# Altium PCB DSpico_PCB.PcbDoc (part 2 of 2)
Units mm, origin at the board's own origin, x right, y up, seen from the top; angles counter-clockwise.
Board outline 27.22 x 30.1 mm, 4 copper layers (L1, L2-GND, L3-PW, L4), stack 0.77 mm thick; 52 components, 45 nets, 173 pads, 142 vias.
Unrouted connection lines stored in the file: 1.
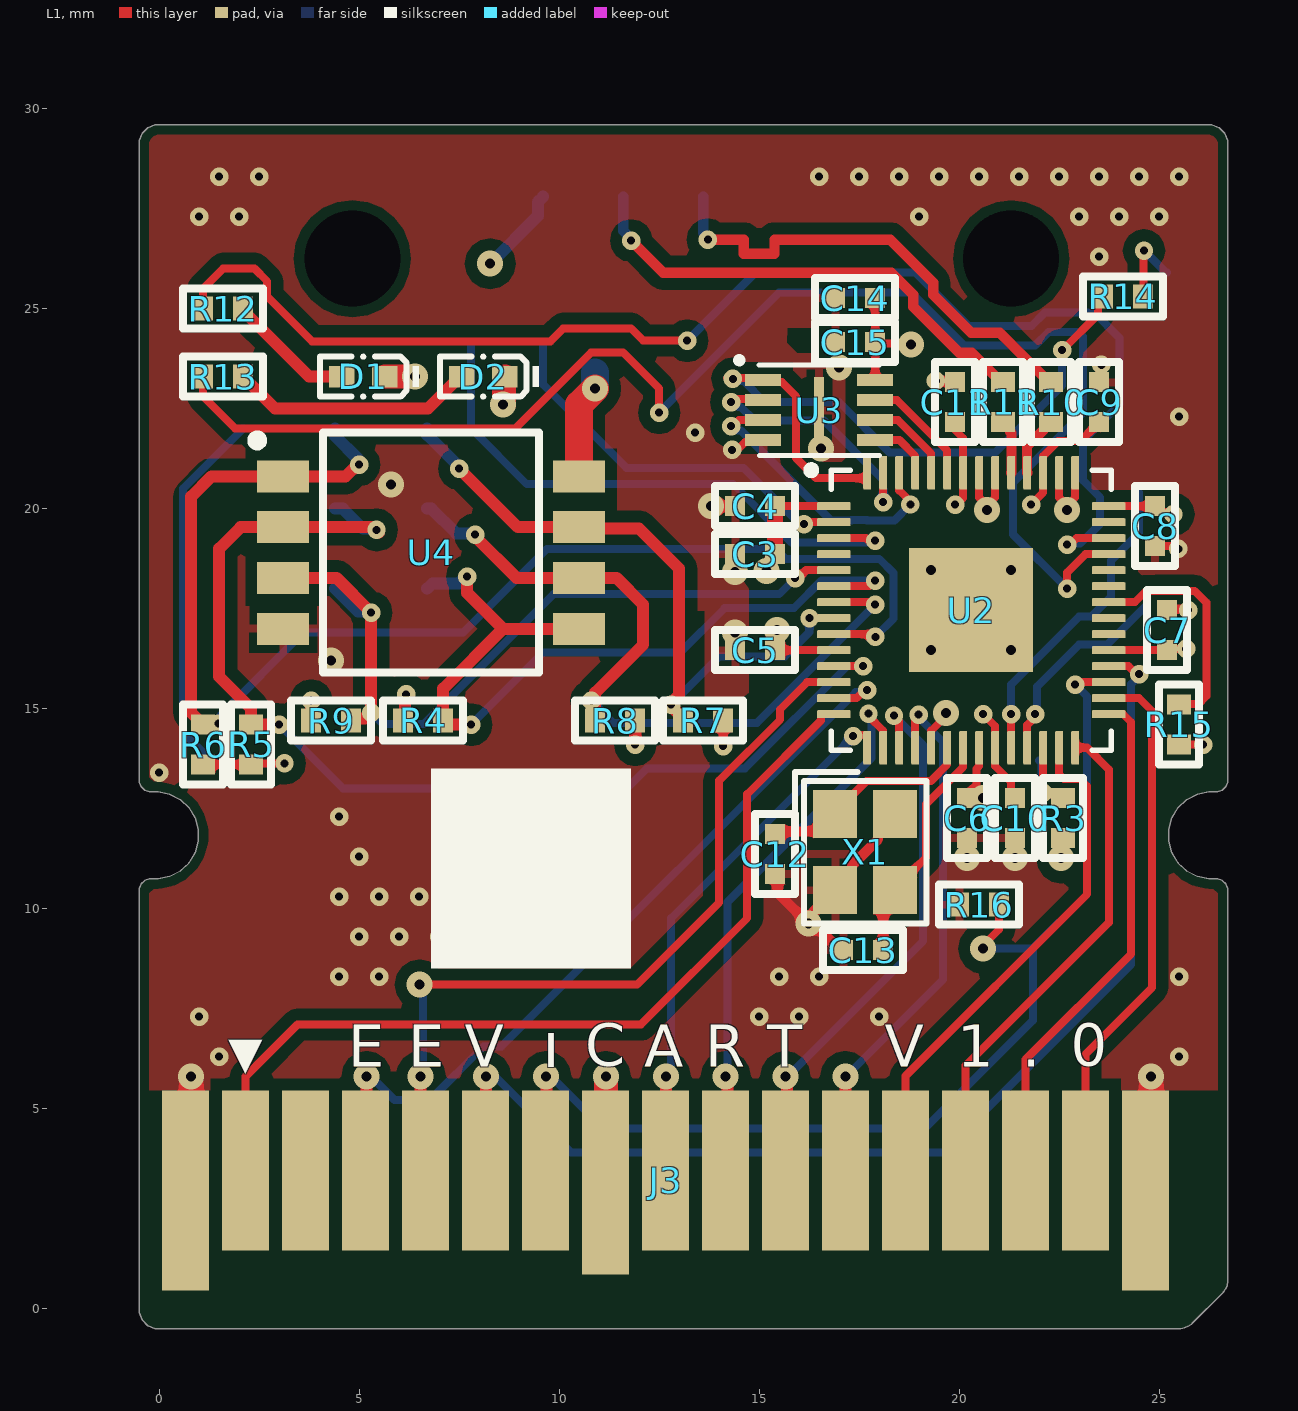
[diagram p0: L1 view]

## Other copper (continued)
L1: (continued)
  pour cut-out: 17.104,24.613 17.104,25 17.5,25 17.511,24.989 17.511,24.624
  pour cut-out: 14.736,14.606 14.736,18.26 15.9,18.26 15.9,14.596
  pour cut-out: 13.636,17.446 13.636,15.236 11.6,15.236 11.6,17.446
  pour cut-out: 17.6,19.9 22.64,19.9 22.693,19.953 22.693,15.101 17.701,15.101 17.7,15.1
L4:
  pour cut-out: -0.038,30.618 -0.296,30.618 -0.355,30.677 -0.355,31.123 -0.03,31.123 -0.028,31.125
  pour cut-out: 24.408,17.817 24.408,9.208 23.3,8.1 22.9,8.5 22.9,16.2
  pour cut-out: 13.777,22.177 13.777,24.3 15.6,24.3 15.6,22.149
  pour cut-out: 15.3,21.9 18.4,21.9 18.4,19.6 18.3,19.5 16.9,19.5 16.9,19.565 14.51,21.955

## Silkscreen, mask and mechanical layers (free items; w line width, h text height)
Top Overlay:
  rectangle: 6.8,8.5 11.8,13.5
  text "▼" at 1.725,5.719 h1.4
  text "C" at 10.649,5.719 h1.8
  text "0" at 22.783,5.719 h1.8
  text "E" at 4.729,5.7 h1.8
  text "E" at 6.229,5.7 h1.8
  text "V" at 7.632,5.7 h1.8
  text "I" at 9.583,5.7 h1.8
  text "A" at 12.12,5.7 h1.8
  text "R" at 13.652,5.7 h1.8
  text "T" at 15.202,5.7 h1.8
  text "V" at 18.132,5.7 h1.8
  text "1" at 19.947,5.7 h1.8
  text "." at 21.579,5.7 h1.8
Bottom Overlay:
  text "Based on DSPico by LNH team" at 27.3,3.1 h1.5
  text "Adapted by Eevitronics" at 27.3,1.4 h1.55
  text "EeviCart Pico V1.0" at 27.3,0.679 h2
Board:
  lines w0.013: -0.502,-0.101 -0.502,-0.002 -0.502,10.444 -0.502,10.507 -0.452,10.621 -0.361,10.706 -0.243,10.748 -0.181,10.743 -0.032,10.743 0.26,10.803 0.525,10.94 0.743,11.143 0.898,11.398 0.978,11.684 0.978,11.982 0.898,12.269 0.743,12.523 0.525,12.727 0.26,12.863 -0.032,12.923 -0.181,12.923 -0.243,12.919 -0.361,12.96 -0.452,13.045 -0.502,13.16 -0.502,13.222 -0.502,29.1 -0.502,29.199 -0.426,29.383 -0.285,29.524 -0.101,29.6 26.314,29.6 26.498,29.524 26.638,29.383 26.715,29.199 26.715,29.1 26.715,13.222 26.715,13.16 26.665,13.045 26.573,12.96 26.456,12.919 26.393,12.923 26.244,12.923 25.952,12.863 25.688,12.727 25.47,12.523 25.315,12.269 25.234,11.982 25.234,11.684 25.315,11.398 25.47,11.143 25.688,10.94 25.952,10.803 26.244,10.743 26.393,10.743 26.456,10.748 26.573,10.706 26.665,10.621 26.715,10.507 26.715,10.444 26.715,0.728 26.715,0.678 26.695,0.582 26.658,0.491 26.603,0.409 26.568,0.374 25.839,-0.355 25.804,-0.39 25.722,-0.445 25.631,-0.483 25.534,-0.502 25.485,-0.502 -0.002,-0.502 -0.101,-0.502 -0.285,-0.426 -0.426,-0.285 -0.502,-0.101
Top 3D Body:
  circle w0.013: c21.099,26.488 r1.3
  circle w0.013: c5.113,26.491 r1.3
  lines w0.013: 0.259,0.828 0.259,8.715 ; 1.485,0.747 1.485,8.466 ; 21.012,1.812 22.22,1.812 ; 23.924,0.756 23.924,6.996 ; 25.195,0.678 25.195,7.231
Mechanical 4:
  circle w0.01: c21.216,25.998 r1.2
  circle w0.01: c5.15,25.998 r1.2
Mechanical 7:
  lines w0.2: -4.3,9.2 31.1,9.2